# EAGLE board homeboard1tmp (EAGLE 6.0)
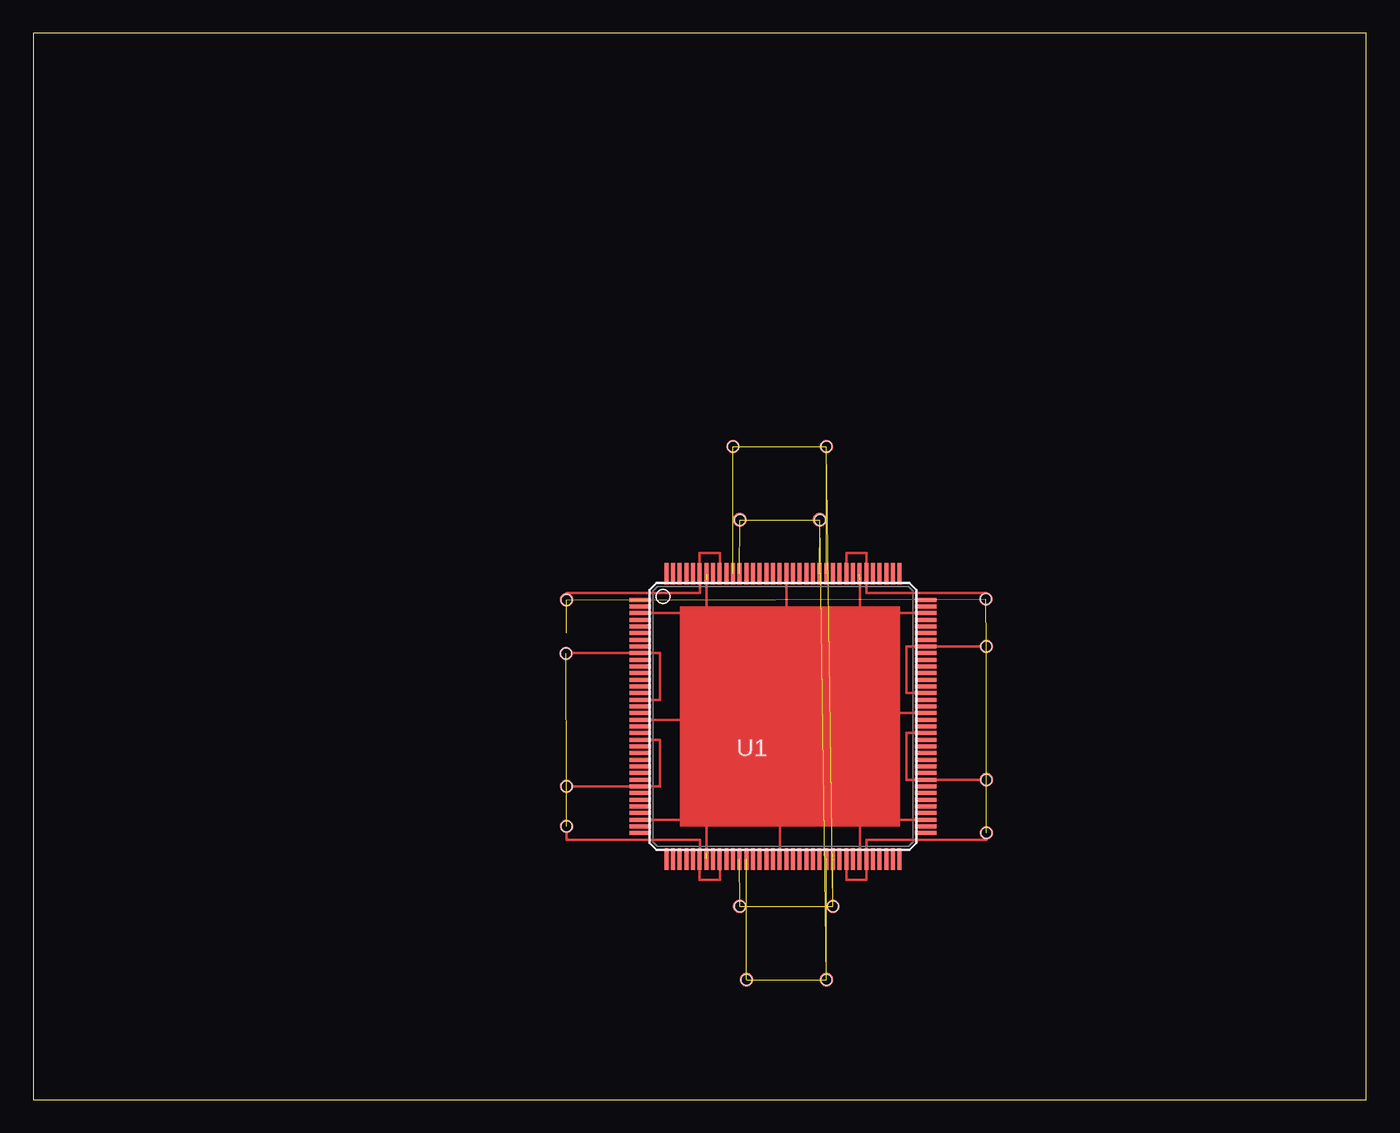
[diagram p0: board, top side]
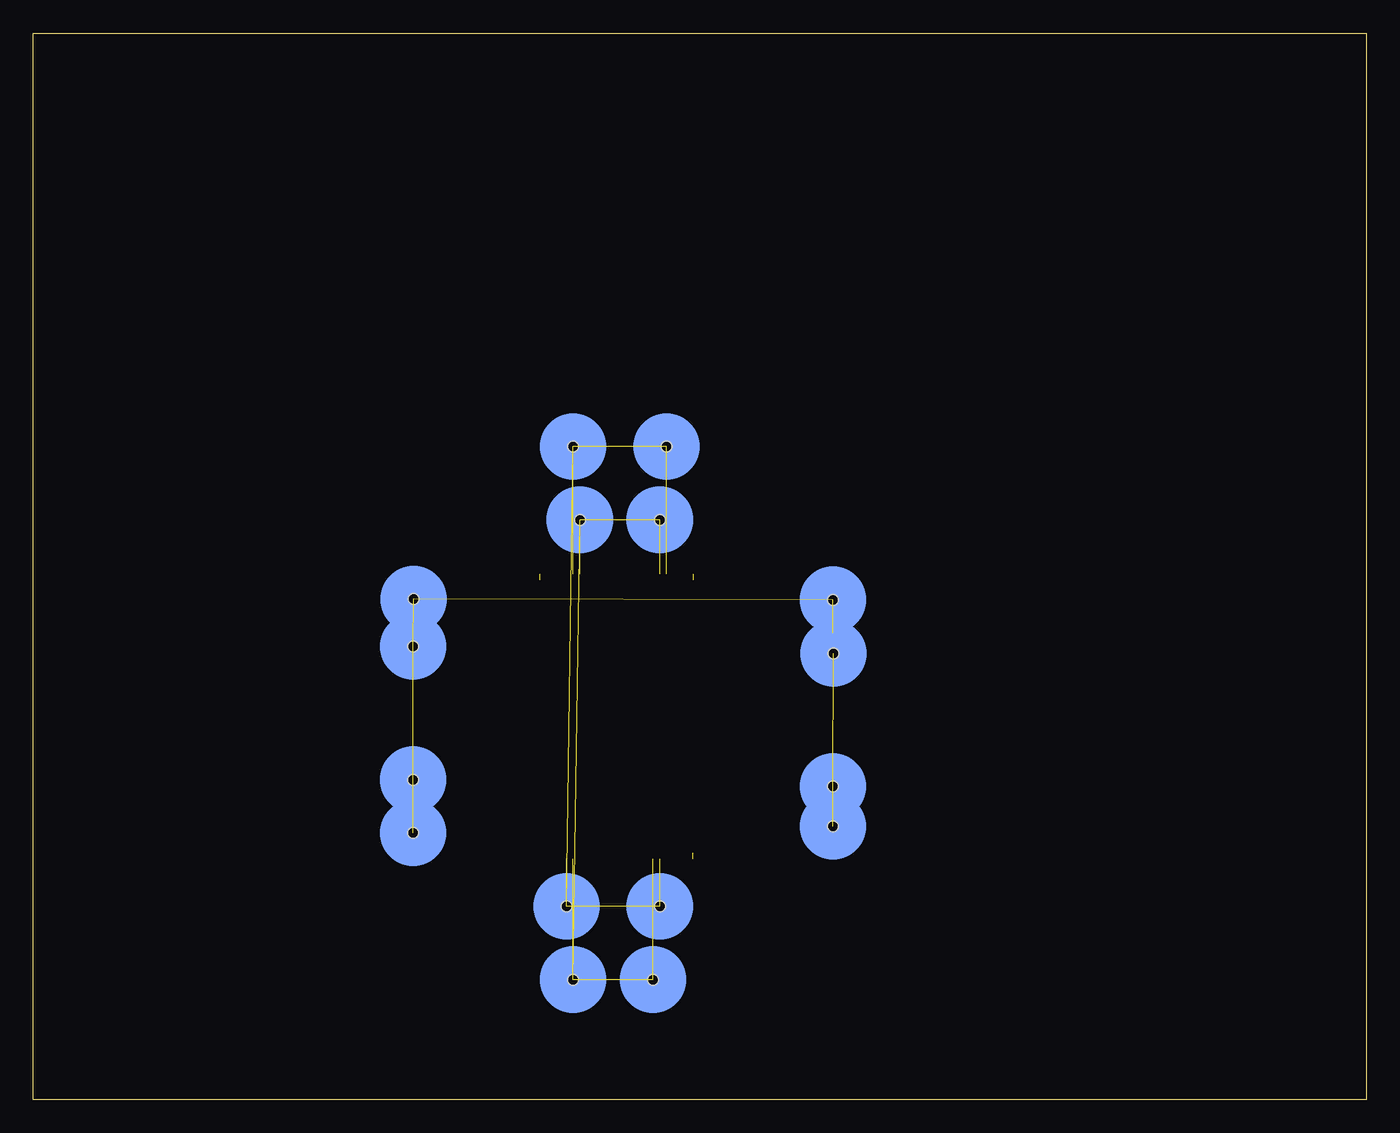
[diagram p1: board, bottom side, seen from below]

Size 100 x 80 mm. Coordinates in mm from the lower left corner, seen from the top.
Outline: 0,0 100,0 100,80 0,80 0,0
Copper layers (1*16): Top 0.035mm / dielectric 1.5mm / Bottom 0.035mm
Design rules: minimum track width 10mil, minimum drill 24mil, track to track 8mil, track to pad 8mil, pad to pad 8mil, via to via 8mil, smd to smd 8mil, copper to edge 40mil, drill to drill 8mil, minimum pad ring 10mil, minimum via ring 8mil, stop-mask expansion 4mil, vias tented up to drill 0mil, thermal gap 10mil

## Footprints (pad centres in the part's own frame; a part is rotated, then mirrored left to right if it is on the bottom)
TQ144 = smd 1.6 x 0.3: P1 -10.7,8.75; P2 -10.7,8.25; P3 -10.7,7.75; P4 -10.7,7.25; P5 -10.7,6.75; P6 -10.7,6.25; P7 -10.7,5.75; P8 -10.7,5.25; P9 -10.7,4.75; P10 -10.7,4.25; P11 -10.7,3.75; P12 -10.7,3.25; P13 -10.7,2.75; P14 -10.7,2.25; P15 -10.7,1.75; P16 -10.7,1.25; P17 -10.7,0.75; P18 -10.7,0.25; P19 -10.7,-0.25; P20 -10.7,-0.75; P21 -10.7,-1.25; P22 -10.7,-1.75; P23 -10.7,-2.25; P24 -10.7,-2.75; P25 -10.7,-3.25; P26 -10.7,-3.75; P27 -10.7,-4.25; P28 -10.7,-4.75; P29 -10.7,-5.25; P30 -10.7,-5.75; P31 -10.7,-6.25; P32 -10.7,-6.75; P33 -10.7,-7.25; P34 -10.7,-7.75; P35 -10.7,-8.25; P36 -10.7,-8.75; P73 10.7,-8.75; P74 10.7,-8.25; P75 10.7,-7.75; P76 10.7,-7.25; P77 10.7,-6.75; P78 10.7,-6.25; P79 10.7,-5.75; P80 10.7,-5.25; P81 10.7,-4.75; P82 10.7,-4.25; P83 10.7,-3.75; P84 10.7,-3.25; P85 10.7,-2.75; P86 10.7,-2.25; P87 10.7,-1.75; P88 10.7,-1.25; P89 10.7,-0.75; P90 10.7,-0.25; P91 10.7,0.25; P92 10.7,0.75; P93 10.7,1.25; P94 10.7,1.75; P95 10.7,2.25; P96 10.7,2.75; P97 10.7,3.25; P98 10.7,3.75; P99 10.7,4.25; P100 10.7,4.75; P101 10.7,5.25; P102 10.7,5.75; P103 10.7,6.25; P104 10.7,6.75; P105 10.7,7.25; P106 10.7,7.75; P107 10.7,8.25; P108 10.7,8.75 | smd 0.3 x 1.6: P37 -8.75,-10.7; P38 -8.25,-10.7; P39 -7.75,-10.7; P40 -7.25,-10.7; P41 -6.75,-10.7; P42 -6.25,-10.7; P43 -5.75,-10.7; P44 -5.25,-10.7; P45 -4.75,-10.7; P46 -4.25,-10.7; P47 -3.75,-10.7; P48 -3.25,-10.7; P49 -2.75,-10.7; P50 -2.25,-10.7; P51 -1.75,-10.7; P52 -1.25,-10.7; P53 -0.75,-10.7; P54 -0.25,-10.7; P55 0.25,-10.7; P56 0.75,-10.7; P57 1.25,-10.7; P58 1.75,-10.7; P59 2.25,-10.7; P60 2.75,-10.7; P61 3.25,-10.7; P62 3.75,-10.7; P63 4.25,-10.7; P64 4.75,-10.7; P65 5.25,-10.7; P66 5.75,-10.7; P67 6.25,-10.7; P68 6.75,-10.7; P69 7.25,-10.7; P70 7.75,-10.7; P71 8.25,-10.7; P72 8.75,-10.7; P109 8.75,10.7; P110 8.25,10.7; P111 7.75,10.7; P112 7.25,10.7; P113 6.75,10.7; P114 6.25,10.7; P115 5.75,10.7; P116 5.25,10.7; P117 4.75,10.7; P118 4.25,10.7; P119 3.75,10.7; P120 3.25,10.7; P121 2.75,10.7; P122 2.25,10.7; P123 1.75,10.7; P124 1.25,10.7; P125 0.75,10.7; P126 0.25,10.7; P127 -0.25,10.7; P128 -0.75,10.7; P129 -1.25,10.7; P130 -1.75,10.7; P131 -2.25,10.7; P132 -2.75,10.7; P133 -3.25,10.7; P134 -3.75,10.7; P135 -4.25,10.7; P136 -4.75,10.7; P137 -5.25,10.7; P138 -5.75,10.7; P139 -6.25,10.7; P140 -6.75,10.7; P141 -7.25,10.7; P142 -7.75,10.7; P143 -8.25,10.7; P144 -8.75,10.7
VIA_DIY = smd 5 x 5 bottom: B 0,0 | smd 1 x 1: T 0,0 | hole 0.8: 0,0

## Placement (x,y rotation side)
U1  XC3S400TQ144  [TQ144]  56.24,28.74 0 top
U$1  VIA_DIY  [VIA_DIY]  53.5,9 0 top
U$2  VIA_DIY  [VIA_DIY]  59,43.5 0 top
U$3  VIA_DIY  [VIA_DIY]  60,14.5 0 top
U$4  VIA_DIY  [VIA_DIY]  59.5,49 0 top
U$5  VIA_DIY  [VIA_DIY]  39.97,33.47 0 top
U$8  VIA_DIY  [VIA_DIY]  40,23.5 0 top
U$9  VIA_DIY  [VIA_DIY]  40,20.5 0 top
U$12  VIA_DIY  [VIA_DIY]  71.5,20 0 top
U$13  VIA_DIY  [VIA_DIY]  71.5,24 0 top
U$16  VIA_DIY  [VIA_DIY]  71.5,34 0 top
U$17  VIA_DIY  [VIA_DIY]  71.47,37.54 0 top
U$20  VIA_DIY  [VIA_DIY]  40,37.5 0 top
U$21  VIA_DIY  [VIA_DIY]  52.5,49 0 top
U$22  VIA_DIY  [VIA_DIY]  53,14.5 0 top
U$23  VIA_DIY  [VIA_DIY]  59.5,9 0 top
U$24  VIA_DIY  [VIA_DIY]  53,43.5 0 top

## Library data of the parts
U1 = xilinx_spartan3_virtex4_and_5
U$1-U$5 U$8 U$9 U$12 U$13 U$16 U$17 U$20-U$24 = cpcfpga

## Nets
GND: U1.P136 U1.P139 U$20.T
GND_B: U$5.B U$8.B U$9.B U$12.B U$13.B U$16.B U$17.B U$20.B
N$1: U1.P9 U1.P16 U$5.T
N$2: U1.P42 U1.P45 U$9.T
N$4: U1.P22 U1.P29 U$8.T
N$8: U1.P64 U1.P67 U$12.T
N$9: U1.P81 U1.P88 U$13.T
N$12: U1.P94 U1.P101 U$16.T
N$13: U1.P114 U1.P117 U$17.T
N$16: U1.P48 U$22.T
N$17: U1.P133 U$24.T
N$18: U1.P61 U$23.T
N$19: U1.P134 U$21.T
N$20: U$3.B U$4.B U$21.B U$22.B
N$21: U1.P62 U$3.T
VCC: U1.P3 U1.P19 U1.P34 U1.P43 U1.P54 U1.P66 U1.P75 U1.P91 U1.P106 U1.P115 U1.P126 U1.P138
VCCAUX: U1.P120 U$4.T
VCCINT01: U1.P49 U$1.T
VCCINT23: U1.P121 U$2.T
VCCINT_B: U$1.B U$2.B U$23.B U$24.B

## Tracks (layer width: path | path; a pad name or v marks a point on that pad's centre or on a via)
GND
  Top 0.2: U$20.T 40,38 50,38 U1.P139 49.99,41 51.5,41 U1.P136
GND_B  (7 unrouted)
  Bottom 0.2: U$5.B 40,33.47 40,35
N$1
  Top 0.2: U$5.T 39.97,33.49 U1.P9 47,33.5 47,29.99 U1.P16
N$2
  Top 0.2: U1.P45 51.5,16.5 49.99,16.5 U1.P42 50,19.5 40,19.5 U$9.T
N$4
  Top 0.2: U$8.T U1.P29 47,23.5 47,26.99 U1.P22
N$8
  Top 0.2: U$12.T 71.5,19.5 62.5,19.5 U1.P67 62.49,16.5 61,16.5 U1.P64
N$9
  Top 0.2: U$13.T U1.P81 65.5,24 65.5,27.49 U1.P88
N$12
  Top 0.2: U$16.T U1.P101 | U1.P94 65.5,30.49 65.5,34 U1.P101 | U1.P101
N$13
  Top 0.2: U1.P114 62.47,39.44 | U1.P114 62.5,38 71.47,38 U$17.T | U1.P117 61,41 62.49,41 U1.P114
N$16  (1 unrouted)
N$17  (1 unrouted)
N$18  (1 unrouted)
N$19  (1 unrouted)
N$20  (3 unrouted)
N$21  (1 unrouted)
VCC  (3 unrouted)
  Top 0.2: U1.P106 62,36.49 | 62,36.49 62,39 | U1.P3 49.71,36.49 | 49.71,36.49 50.5,36.49 | 62,20.99 U1.P66 | U1.P34 49.71,20.99 | U1.P91 62,28.99 | 62,28.99 62,36 | 62,36 62,36.49 | U1.P75 62,20.99 | 62,20.99 62,21 | 62,21 62,27 | 50.5,36.49 50.5,36.5 50.5,39 | 50.5,20.99 49.71,20.99 | 49.71,20.99 49.71,26 | 49.71,26 49.71,28.49 | 49.71,28.49 49.71,36.49 | U1.P19 49.71,28.49 | U1.P126 56.49,36 56,36 56,27 | 56,26 56,27 | 56,27 62,27 | U1.P54 56,21 | 56,21 56,26 | 56,26 49.71,26 | 50.5,20.99 50.5,18.5 | 50.5,20.99 50.5,21 56,21 | 56,21 62,21 | 62,27 62,28.99 | 62,36 50.5,36 50.5,36.49
VCCAUX  (1 unrouted)
VCCINT01  (1 unrouted)
VCCINT23  (1 unrouted)
VCCINT_B  (3 unrouted)
(copper drawn outside any net)
  shapes: Top area x1